# EAGLE board development_board_V2 (EAGLE 6.4)
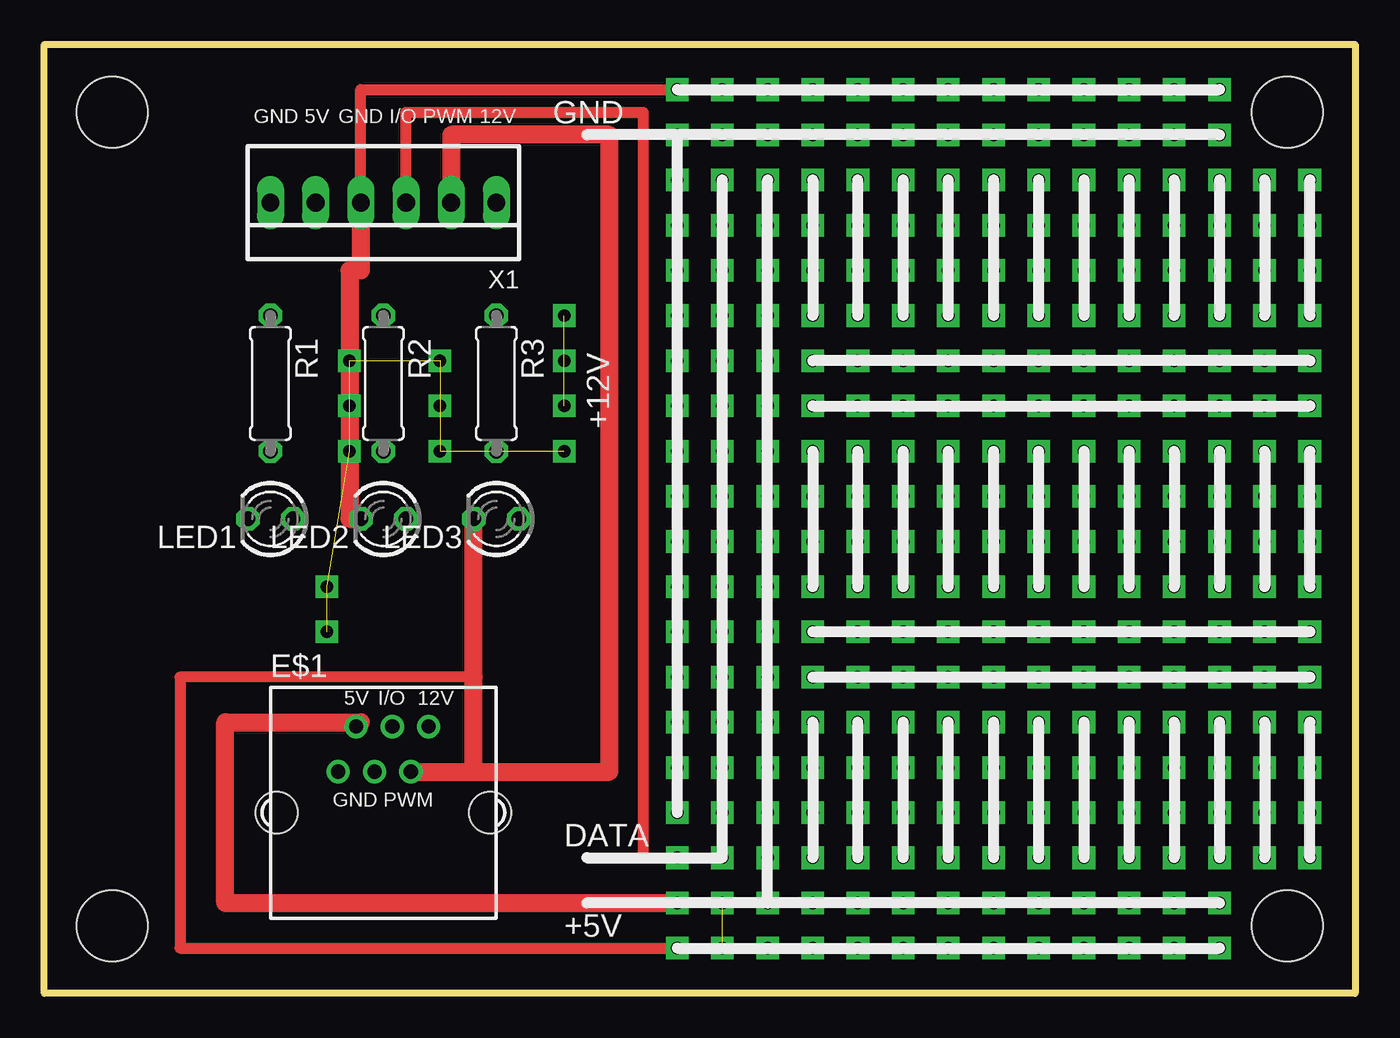
[diagram p0: board, top side]
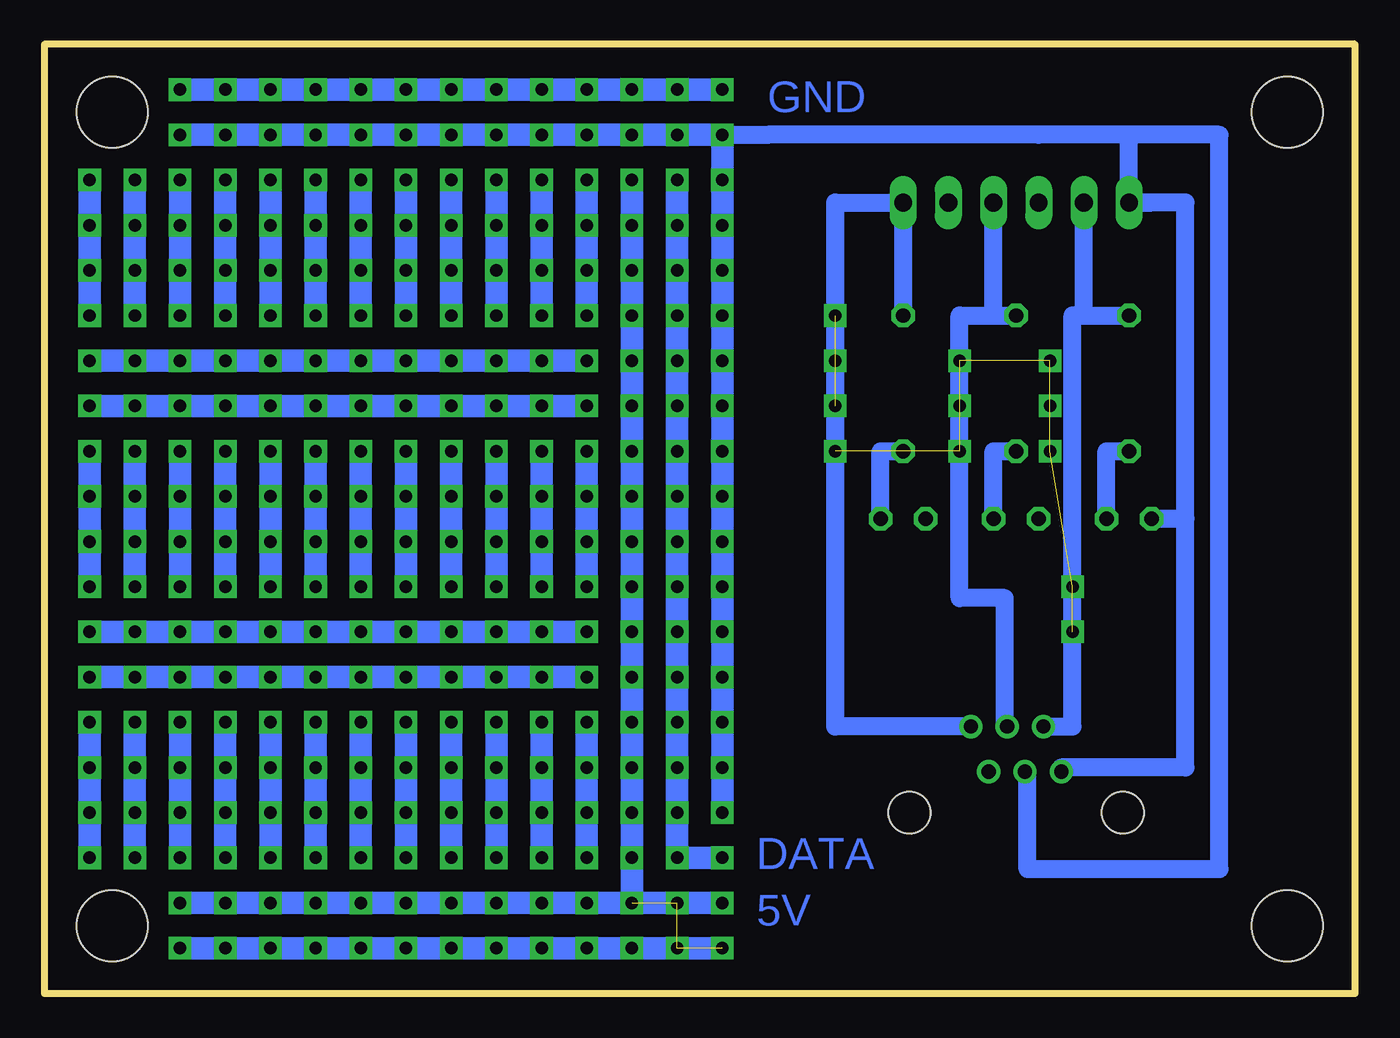
[diagram p1: board, bottom side, seen from below]

Size 73.66 x 53.34 mm. Coordinates in mm from the lower left corner, seen from the top.
Outline: 0,53.34 73.66,53.34 73.66,0 0,0 0,53.34
Copper layers (1*16): Top 0.035mm / dielectric 1.5mm / Bottom 0.035mm
Design rules "default": minimum track width 10mil, minimum drill 24mil, track to track 8mil, track to pad 8mil, pad to pad 8mil, via to via 8mil, smd to smd 8mil, copper to edge 40mil, drill to drill 8mil, minimum pad ring 10mil, minimum via ring 8mil, stop-mask expansion 4mil, vias tented up to drill 0mil, thermal gap 10mil
Net classes: 0 default: width 0.457 mm; 1 power: width 0.914 mm
Holes 4 mm at 3.81,3.81 3.81,49.53 69.85,49.53 69.85,3.81
Milling: 4 lines

## Footprints (pad centres in the part's own frame; a part is rotated, then mirrored left to right if it is on the bottom)
YH-55-10 = drill 0.8 pad 1.3: 1 -2.54,2.3; 2 -1.54,4.84; 3 -0.5,2.3; 4 0.5,4.84; 5 1.54,2.3; 6 2.54,4.84 | hole 2.36: -6,0; 6,0
LED3MM = drill 0.813 octagon: A -1.27,0; K 1.27,0
0207/7 = drill 0.813 octagon: 1 -3.81,0; 2 3.81,0
22-23-2061 = drill 1 long: 1 -6.35,0; 2 -3.81,0; 3 -1.27,0; 4 1.27,0; 5 3.81,0; 6 6.35,0

## Placement (x,y rotation side)
E$1  [YH-55-10]  19.05,10.16 0 top
LED1  [LED3MM]  12.7,26.67 180 top
LED2  [LED3MM]  19.05,26.67 180 top
LED3  [LED3MM]  25.4,26.67 180 top
R1  1k  [0207/7]  12.7,34.29 270 top
R2  1k  [0207/7]  19.05,34.29 270 top
R3  1k  [0207/7]  25.4,34.29 270 top
X1  [22-23-2061]  19.05,44.45 180 top

## Library data of the parts
E$1 = lpatiny
LED1-LED3 = led
R1-R3 = rcl
X1 = con-molex; MF: MOLEX; MPN: 22-23-2061; OC_FARNELL: 1462922; OC_NEWARK: 27C1933

## Nets
S$1: E$1.1 E$1.3 LED1.K X1.6
S$2: E$1.2 R1.1 X1.5
S$4: E$1.4 R2.1 X1.3
S$5: LED2.K X1.4
S$6: E$1.5 LED3.K X1.2
S$7: E$1.6 R3.1 X1.1
S$9: LED1.A R1.2
S$40: LED2.A R2.2
S$43: LED3.A R3.2

## Tracks (layer width: path | path; a pad name or v marks a point on that pad's centre or on a via)
S$1
  Bottom 1.016: X1.6 11.43,44.45 | E$1.1 16.51,12.7 9.53,12.7 9.53,26.67 | 9.53,26.67 9.53,44.45 X1.6 | 9.53,26.67 LED1.K | 33.02,48.26 17.78,48.26 12.7,48.26 | E$1.3 18.41,12.46 18.41,6.99 7.62,6.99 7.62,48.26 12.7,48.26 | X1.6 12.7,48.26
S$2
  Bottom 1.016: E$1.2 15.88,15 15.88,38.1 15.24,38.1 | 15.24,38.1 X1.5 | 15.24,38.1 R1.1
S$3  (via drill 0.7 pad 1.27)
  other vias: 35.56,35.56
S$4  (via drill 0.7 pad 1.27)
  Top 0.61: X1.3 20.32,49.53 33.66,49.53 33.66,7.62 v35.56,7.62
  Bottom 1.016: E$1.4 19.68,15 19.68,22.23 22.23,22.23 22.23,38.1 20.32,38.1 | 20.32,38.1 X1.3 | 20.32,38.1 R2.1
  Bottom 1.27: v38.1,38.1 v38.1,45.72 v38.1,7.62 | v38.1,7.62 v38.1,15.24 | v35.56,7.62 v38.1,7.62
S$5  (via drill 0.7 pad 1.27)
  Top 0.61: X1.4 17.78,50.8 v35.56,50.8
  Top 1.016: X1.4 17.78,40.64 17.14,40.64 17.14,26.67 LED2.K
  Bottom 1.27: v35.56,50.8 v66.04,50.8
S$6  (via drill 0.7 pad 1.27)  (3 unrouted)
  Top 0.61: LED3.K 24.13,17.78 7.62,17.78 7.62,2.54 v35.56,2.54
  Top 1.016: X1.2 22.86,48.26 31.75,48.26 31.75,12.46 E$1.5 24.13,12.46 24.13,17.78 LED3.K | v35.56,5.08 10.16,5.08 10.16,15.24 17.78,15.24
  Bottom 1.27: v40.64,38.1 v40.64,45.72 v40.64,5.08 | v40.64,5.08 v66.04,5.08 | v35.56,5.08 v40.64,5.08 | v35.56,2.54 v66.04,2.54
  other vias: 38.1,5.08 38.1,2.54
S$7
  Bottom 1.016: E$1.6 29.21,15 29.21,44.45 X1.1 R3.1
S$8  (via drill 0.7 pad 1.27)  (8 unrouted)
  other vias: 29.21,30.48 17.14,35.56 15.88,20.32 15.88,22.86 22.23,35.56 22.23,33.02 22.23,30.48 17.14,33.02 17.14,30.48
S$9
  Bottom 1.016: LED1.A 13.97,30.48 R1.2
S$10  (via drill 0.7 pad 1.27)
  other vias: 40.64,2.54
S$12  (via drill 0.7 pad 1.27)
  other vias: 63.5,5.08
S$13  (via drill 0.7 pad 1.27)
  Bottom 1.27: v50.8,38.1 v50.8,40.64 v50.8,43.18 v50.8,45.72
S$14  (via drill 0.7 pad 1.27)
  other vias: 60.96,5.08
S$15  (via drill 0.7 pad 1.27)
  Bottom 1.27: v55.88,38.1 v55.88,40.64 v55.88,43.18 v55.88,45.72
S$16  (via drill 0.7 pad 1.27)
  other vias: 58.42,5.08
S$17  (via drill 0.7 pad 1.27)
  Bottom 1.27: v60.96,38.1 v60.96,40.64 v60.96,43.18 v60.96,45.72
S$18  (via drill 0.7 pad 1.27)
  other vias: 55.88,5.08
S$19  (via drill 0.7 pad 1.27)
  Bottom 1.27: v66.04,38.1 v66.04,40.64 v66.04,43.18 v66.04,45.72
S$20  (via drill 0.7 pad 1.27)
  other vias: 53.34,5.08
S$21  (via drill 0.7 pad 1.27)
  Bottom 1.27: v71.12,38.1 v71.12,45.72
S$22  (via drill 0.7 pad 1.27)
  other vias: 43.18,40.64
S$23  (via drill 0.7 pad 1.27)
  other vias: 50.8,5.08
S$24  (via drill 0.7 pad 1.27)
  other vias: 48.26,5.08
S$25  (via drill 0.7 pad 1.27)
  other vias: 45.72,5.08
S$26  (via drill 0.7 pad 1.27)
  other vias: 43.18,48.26
S$27  (via drill 0.7 pad 1.27)
  other vias: 43.18,50.8
S$29  (via drill 0.7 pad 1.27)
  other vias: 63.5,2.54
S$30  (via drill 0.7 pad 1.27)
  other vias: 60.96,2.54
S$31  (via drill 0.7 pad 1.27)
  other vias: 58.42,2.54
S$32  (via drill 0.7 pad 1.27)
  other vias: 68.58,40.64
S$33  (via drill 0.7 pad 1.27)
  other vias: 71.12,40.64
S$34  (via drill 0.7 pad 1.27)
  other vias: 43.18,43.18
S$35  (via drill 0.7 pad 1.27)
  other vias: 55.88,2.54
S$36  (via drill 0.7 pad 1.27)
  other vias: 53.34,2.54
S$37  (via drill 0.7 pad 1.27)
  other vias: 50.8,2.54
S$38  (via drill 0.7 pad 1.27)
  other vias: 48.26,2.54
S$39  (via drill 0.7 pad 1.27)
  other vias: 45.72,2.54
S$40
  Bottom 1.016: LED2.A 20.32,30.48 R2.2
S$41  (via drill 0.7 pad 1.27)
  other vias: 40.64,40.64
S$42  (via drill 0.7 pad 1.27)
  other vias: 40.64,43.18
S$43
  Bottom 1.016: LED3.A 26.67,30.48 R3.2
S$44  (via drill 0.7 pad 1.27)
  other vias: 68.58,43.18
S$45  (via drill 0.7 pad 1.27)
  other vias: 71.12,43.18
S$46  (via drill 0.7 pad 1.27)
  Bottom 1.27: v43.18,38.1 v43.18,45.72
S$47  (via drill 0.7 pad 1.27)
  Bottom 1.27: v45.72,45.72 v45.72,43.18 v45.72,40.64 v45.72,38.1
S$48  (via drill 0.7 pad 1.27)
  Bottom 1.27: v48.26,45.72 v48.26,43.18 v48.26,40.64 v48.26,38.1
S$49  (via drill 0.7 pad 1.27)
  other vias: 40.64,35.56
S$50  (via drill 0.7 pad 1.27)
  Bottom 1.27: v53.34,45.72 v53.34,43.18 v53.34,40.64 v53.34,38.1
S$51  (via drill 0.7 pad 1.27)
  other vias: 40.64,33.02
S$52  (via drill 0.7 pad 1.27)
  Bottom 1.27: v58.42,45.72 v58.42,43.18 v58.42,40.64 v58.42,38.1
S$53  (via drill 0.7 pad 1.27)
  other vias: 40.64,25.4
S$54  (via drill 0.7 pad 1.27)
  Bottom 1.27: v63.5,45.72 v63.5,43.18 v63.5,40.64 v63.5,38.1
S$55  (via drill 0.7 pad 1.27)
  other vias: 40.64,27.94
S$56  (via drill 0.7 pad 1.27)
  Bottom 1.27: v68.58,38.1 v68.58,45.72
S$57  (via drill 0.7 pad 1.27)
  Bottom 1.27: v40.64,22.86 v40.64,30.48
S$58  (via drill 0.7 pad 1.27)
  other vias: 40.64,20.32
S$59  (via drill 0.7 pad 1.27)
  other vias: 68.58,35.56
S$60  (via drill 0.7 pad 1.27)
  other vias: 66.04,35.56
S$61  (via drill 0.7 pad 1.27)
  other vias: 63.5,35.56
S$62  (via drill 0.7 pad 1.27)
  other vias: 60.96,35.56
S$63  (via drill 0.7 pad 1.27)
  other vias: 58.42,35.56
S$64  (via drill 0.7 pad 1.27)
  other vias: 55.88,35.56
S$65  (via drill 0.7 pad 1.27)
  other vias: 53.34,35.56
S$66  (via drill 0.7 pad 1.27)
  other vias: 50.8,35.56
S$67  (via drill 0.7 pad 1.27)
  other vias: 48.26,35.56
S$68  (via drill 0.7 pad 1.27)
  other vias: 45.72,35.56
S$69  (via drill 0.7 pad 1.27)
  Bottom 1.27: v43.18,35.56 v71.12,35.56
S$70  (via drill 0.7 pad 1.27)
  other vias: 68.58,33.02
S$71  (via drill 0.7 pad 1.27)
  other vias: 66.04,33.02
S$72  (via drill 0.7 pad 1.27)
  other vias: 63.5,33.02
S$73  (via drill 0.7 pad 1.27)
  other vias: 60.96,33.02
S$74  (via drill 0.7 pad 1.27)
  other vias: 58.42,33.02
S$75  (via drill 0.7 pad 1.27)
  other vias: 55.88,33.02
S$76  (via drill 0.7 pad 1.27)
  other vias: 53.34,33.02
S$77  (via drill 0.7 pad 1.27)
  other vias: 50.8,33.02
S$78  (via drill 0.7 pad 1.27)
  other vias: 48.26,33.02
S$79  (via drill 0.7 pad 1.27)
  other vias: 45.72,33.02
S$80  (via drill 0.7 pad 1.27)
  Bottom 1.27: v43.18,33.02 v71.12,33.02
S$81  (via drill 0.7 pad 1.27)
  Bottom 1.27: v50.8,22.86 v50.8,25.4 v50.8,27.94 v50.8,30.48
S$82  (via drill 0.7 pad 1.27)
  Bottom 1.27: v55.88,22.86 v55.88,25.4 v55.88,27.94 v55.88,30.48
S$83  (via drill 0.7 pad 1.27)
  Bottom 1.27: v60.96,22.86 v60.96,25.4 v60.96,27.94 v60.96,30.48
S$84  (via drill 0.7 pad 1.27)
  Bottom 1.27: v66.04,22.86 v66.04,25.4 v66.04,27.94 v66.04,30.48
S$85  (via drill 0.7 pad 1.27)
  Bottom 1.27: v71.12,22.86 v71.12,30.48
S$86  (via drill 0.7 pad 1.27)
  other vias: 43.18,25.4
S$87  (via drill 0.7 pad 1.27)
  other vias: 68.58,25.4
S$88  (via drill 0.7 pad 1.27)
  other vias: 71.12,25.4
S$89  (via drill 0.7 pad 1.27)
  other vias: 43.18,27.94
S$90  (via drill 0.7 pad 1.27)
  other vias: 68.58,27.94
S$91  (via drill 0.7 pad 1.27)
  other vias: 71.12,27.94
S$92  (via drill 0.7 pad 1.27)
  Bottom 1.27: v43.18,22.86 v43.18,30.48
S$93  (via drill 0.7 pad 1.27)
  Bottom 1.27: v45.72,30.48 v45.72,27.94 v45.72,25.4 v45.72,22.86
S$94  (via drill 0.7 pad 1.27)
  Bottom 1.27: v48.26,30.48 v48.26,27.94 v48.26,25.4 v48.26,22.86
S$95  (via drill 0.7 pad 1.27)
  Bottom 1.27: v53.34,30.48 v53.34,27.94 v53.34,25.4 v53.34,22.86
S$96  (via drill 0.7 pad 1.27)
  Bottom 1.27: v58.42,30.48 v58.42,27.94 v58.42,25.4 v58.42,22.86
S$97  (via drill 0.7 pad 1.27)
  Bottom 1.27: v63.5,30.48 v63.5,27.94 v63.5,25.4 v63.5,22.86
S$98  (via drill 0.7 pad 1.27)
  Bottom 1.27: v68.58,22.86 v68.58,30.48
S$99  (via drill 0.7 pad 1.27)
  other vias: 68.58,20.32
S$100  (via drill 0.7 pad 1.27)
  other vias: 66.04,20.32
S$101  (via drill 0.7 pad 1.27)
  other vias: 63.5,20.32
S$102  (via drill 0.7 pad 1.27)
  other vias: 60.96,20.32
S$103  (via drill 0.7 pad 1.27)
  other vias: 58.42,20.32
S$104  (via drill 0.7 pad 1.27)
  other vias: 55.88,20.32
S$105  (via drill 0.7 pad 1.27)
  other vias: 53.34,20.32
S$106  (via drill 0.7 pad 1.27)
  other vias: 50.8,20.32
S$107  (via drill 0.7 pad 1.27)
  other vias: 48.26,20.32
S$108  (via drill 0.7 pad 1.27)
  other vias: 45.72,20.32
S$109  (via drill 0.7 pad 1.27)
  Bottom 1.27: v43.18,20.32 v71.12,20.32
S$110  (via drill 0.7 pad 1.27)
  other vias: 68.58,17.78
S$111  (via drill 0.7 pad 1.27)
  other vias: 66.04,17.78
S$112  (via drill 0.7 pad 1.27)
  other vias: 63.5,17.78
S$113  (via drill 0.7 pad 1.27)
  other vias: 60.96,17.78
S$114  (via drill 0.7 pad 1.27)
  other vias: 58.42,17.78
S$115  (via drill 0.7 pad 1.27)
  other vias: 55.88,17.78
S$116  (via drill 0.7 pad 1.27)
  other vias: 53.34,17.78
S$117  (via drill 0.7 pad 1.27)
  other vias: 50.8,17.78
S$118  (via drill 0.7 pad 1.27)
  other vias: 48.26,17.78
S$119  (via drill 0.7 pad 1.27)
  other vias: 45.72,17.78
S$120  (via drill 0.7 pad 1.27)
  Bottom 1.27: v43.18,17.78 v71.12,17.78
S$121  (via drill 0.7 pad 1.27)
  Bottom 1.27: v50.8,7.62 v50.8,10.16 v50.8,12.7 v50.8,15.24
S$122  (via drill 0.7 pad 1.27)
  Bottom 1.27: v55.88,7.62 v55.88,10.16 v55.88,12.7 v55.88,15.24
S$123  (via drill 0.7 pad 1.27)
  Bottom 1.27: v60.96,7.62 v60.96,10.16 v60.96,12.7 v60.96,15.24
S$124  (via drill 0.7 pad 1.27)
  Bottom 1.27: v66.04,7.62 v66.04,10.16 v66.04,12.7 v66.04,15.24
S$125  (via drill 0.7 pad 1.27)
  Bottom 1.27: v71.12,7.62 v71.12,15.24
S$126  (via drill 0.7 pad 1.27)
  other vias: 43.18,10.16
S$127  (via drill 0.7 pad 1.27)
  other vias: 68.58,10.16
S$128  (via drill 0.7 pad 1.27)
  other vias: 71.12,10.16
S$129  (via drill 0.7 pad 1.27)
  other vias: 43.18,12.7
S$130  (via drill 0.7 pad 1.27)
  other vias: 68.58,12.7
S$131  (via drill 0.7 pad 1.27)
  other vias: 71.12,12.7
S$132  (via drill 0.7 pad 1.27)
  Bottom 1.27: v43.18,7.62 v43.18,15.24
S$133  (via drill 0.7 pad 1.27)
  Bottom 1.27: v45.72,15.24 v45.72,12.7 v45.72,10.16 v45.72,7.62
S$134  (via drill 0.7 pad 1.27)
  Bottom 1.27: v48.26,15.24 v48.26,12.7 v48.26,10.16 v48.26,7.62
S$135  (via drill 0.7 pad 1.27)
  Bottom 1.27: v53.34,15.24 v53.34,12.7 v53.34,10.16 v53.34,7.62
S$136  (via drill 0.7 pad 1.27)
  Bottom 1.27: v58.42,15.24 v58.42,12.7 v58.42,10.16 v58.42,7.62
S$137  (via drill 0.7 pad 1.27)
  Bottom 1.27: v63.5,15.24 v63.5,12.7 v63.5,10.16 v63.5,7.62
S$138  (via drill 0.7 pad 1.27)
  Bottom 1.27: v68.58,7.62 v68.58,15.24
S$139  (via drill 0.7 pad 1.27)
  other vias: 38.1,48.26
S$141  (via drill 0.7 pad 1.27)
  other vias: 63.5,50.8
S$142  (via drill 0.7 pad 1.27)
  other vias: 60.96,50.8
S$143  (via drill 0.7 pad 1.27)
  other vias: 58.42,50.8
S$144  (via drill 0.7 pad 1.27)
  other vias: 55.88,50.8
S$145  (via drill 0.7 pad 1.27)
  other vias: 53.34,50.8
S$146  (via drill 0.7 pad 1.27)
  other vias: 50.8,50.8
S$147  (via drill 0.7 pad 1.27)
  other vias: 48.26,50.8
S$148  (via drill 0.7 pad 1.27)
  other vias: 45.72,50.8
S$152  (via drill 0.7 pad 1.27)
  other vias: 63.5,48.26
S$153  (via drill 0.7 pad 1.27)
  other vias: 60.96,48.26
S$154  (via drill 0.7 pad 1.27)
  other vias: 58.42,48.26
S$155  (via drill 0.7 pad 1.27)
  other vias: 55.88,48.26
S$156  (via drill 0.7 pad 1.27)
  other vias: 53.34,48.26
S$157  (via drill 0.7 pad 1.27)
  other vias: 50.8,48.26
S$158  (via drill 0.7 pad 1.27)
  other vias: 48.26,48.26
S$159  (via drill 0.7 pad 1.27)
  other vias: 45.72,48.26
S$161  (via drill 0.7 pad 1.27)
  other vias: 40.64,17.78
S$162  (via drill 0.7 pad 1.27)
  other vias: 40.64,10.16
S$163  (via drill 0.7 pad 1.27)
  other vias: 40.64,12.7
S$164  (via drill 0.7 pad 1.27)
  Bottom 1.27: v40.64,7.62 v40.64,15.24
S$165  (via drill 0.7 pad 1.27)
  other vias: 40.64,50.8
S$166  (via drill 0.7 pad 1.27)
  other vias: 40.64,48.26
S$168  (via drill 0.7 pad 1.27)
  other vias: 38.1,40.64
S$169  (via drill 0.7 pad 1.27)
  other vias: 38.1,43.18
S$170  (via drill 0.7 pad 1.27)
  Bottom 1.016: v35.56,48.26 33.02,48.26
  Bottom 1.27: v66.04,48.26 v35.56,48.26 v35.56,10.16
S$171  (via drill 0.7 pad 1.27)
  other vias: 38.1,35.56
S$172  (via drill 0.7 pad 1.27)
  other vias: 38.1,33.02
S$173  (via drill 0.7 pad 1.27)
  other vias: 38.1,25.4
S$174  (via drill 0.7 pad 1.27)
  other vias: 38.1,27.94
S$175  (via drill 0.7 pad 1.27)
  Bottom 1.27: v38.1,22.86 v38.1,30.48
S$176  (via drill 0.7 pad 1.27)
  other vias: 38.1,20.32
S$177  (via drill 0.7 pad 1.27)
  other vias: 38.1,17.78
S$178  (via drill 0.7 pad 1.27)
  other vias: 38.1,10.16
S$179  (via drill 0.7 pad 1.27)
  other vias: 38.1,12.7
S$182  (via drill 0.7 pad 1.27)
  other vias: 38.1,50.8
S$184  (via drill 0.7 pad 1.27)
  other vias: 35.56,40.64
S$185  (via drill 0.7 pad 1.27)
  other vias: 35.56,43.18
S$186  (via drill 0.7 pad 1.27)
  Bottom 1.27: v35.56,38.1 v35.56,45.72
S$187  (via drill 0.7 pad 1.27)  (2 unrouted)
  other vias: 29.21,38.1 29.21,35.56 29.21,33.02
S$188  (via drill 0.7 pad 1.27)
  other vias: 35.56,33.02
S$189  (via drill 0.7 pad 1.27)
  other vias: 35.56,25.4
S$190  (via drill 0.7 pad 1.27)
  other vias: 35.56,27.94
S$191  (via drill 0.7 pad 1.27)
  Bottom 1.27: v35.56,22.86 v35.56,30.48
S$192  (via drill 0.7 pad 1.27)
  other vias: 35.56,20.32
S$193  (via drill 0.7 pad 1.27)
  other vias: 35.56,17.78
S$195  (via drill 0.7 pad 1.27)
  other vias: 35.56,12.7
S$196  (via drill 0.7 pad 1.27)
  other vias: 35.56,15.24
S$216  (via drill 0.7 pad 1.27)
  other vias: 43.18,5.08
S$217  (via drill 0.7 pad 1.27)
  other vias: 43.18,2.54

## Text on the board
Bottom: GND | DATA | 5V
tPlace: GND | 5V | GND | I/O | PWM | 12V | GND | +12V | DATA | +5V